# EAGLE board r0.4.0 (EAGLE 7.2.0)
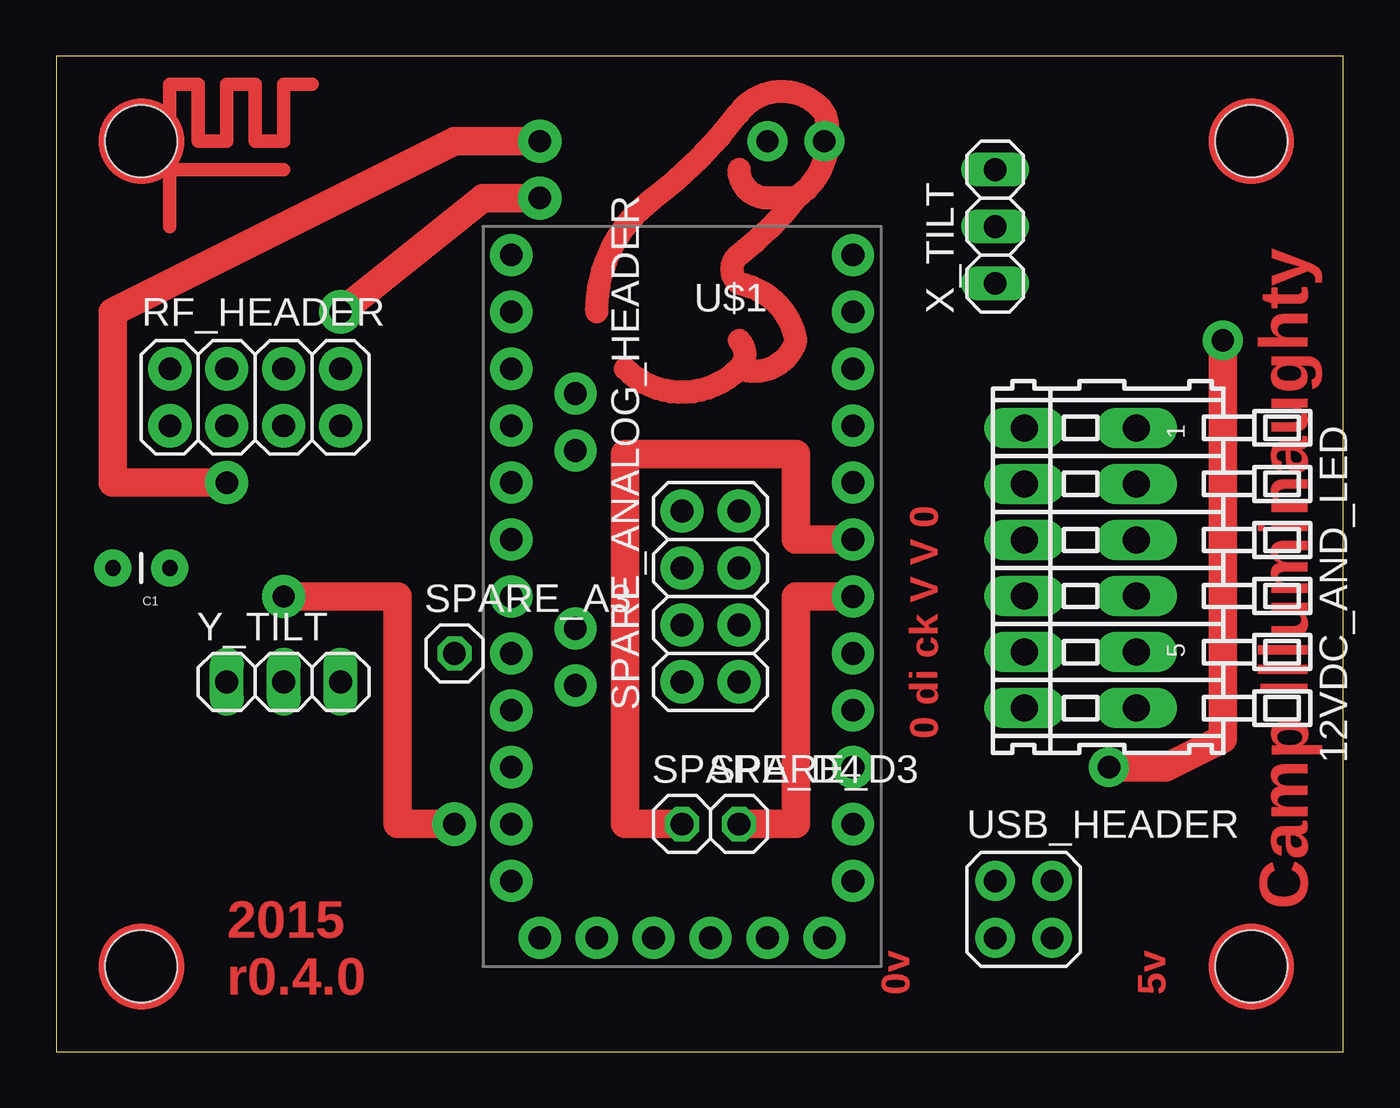
[diagram p0: board, top side]
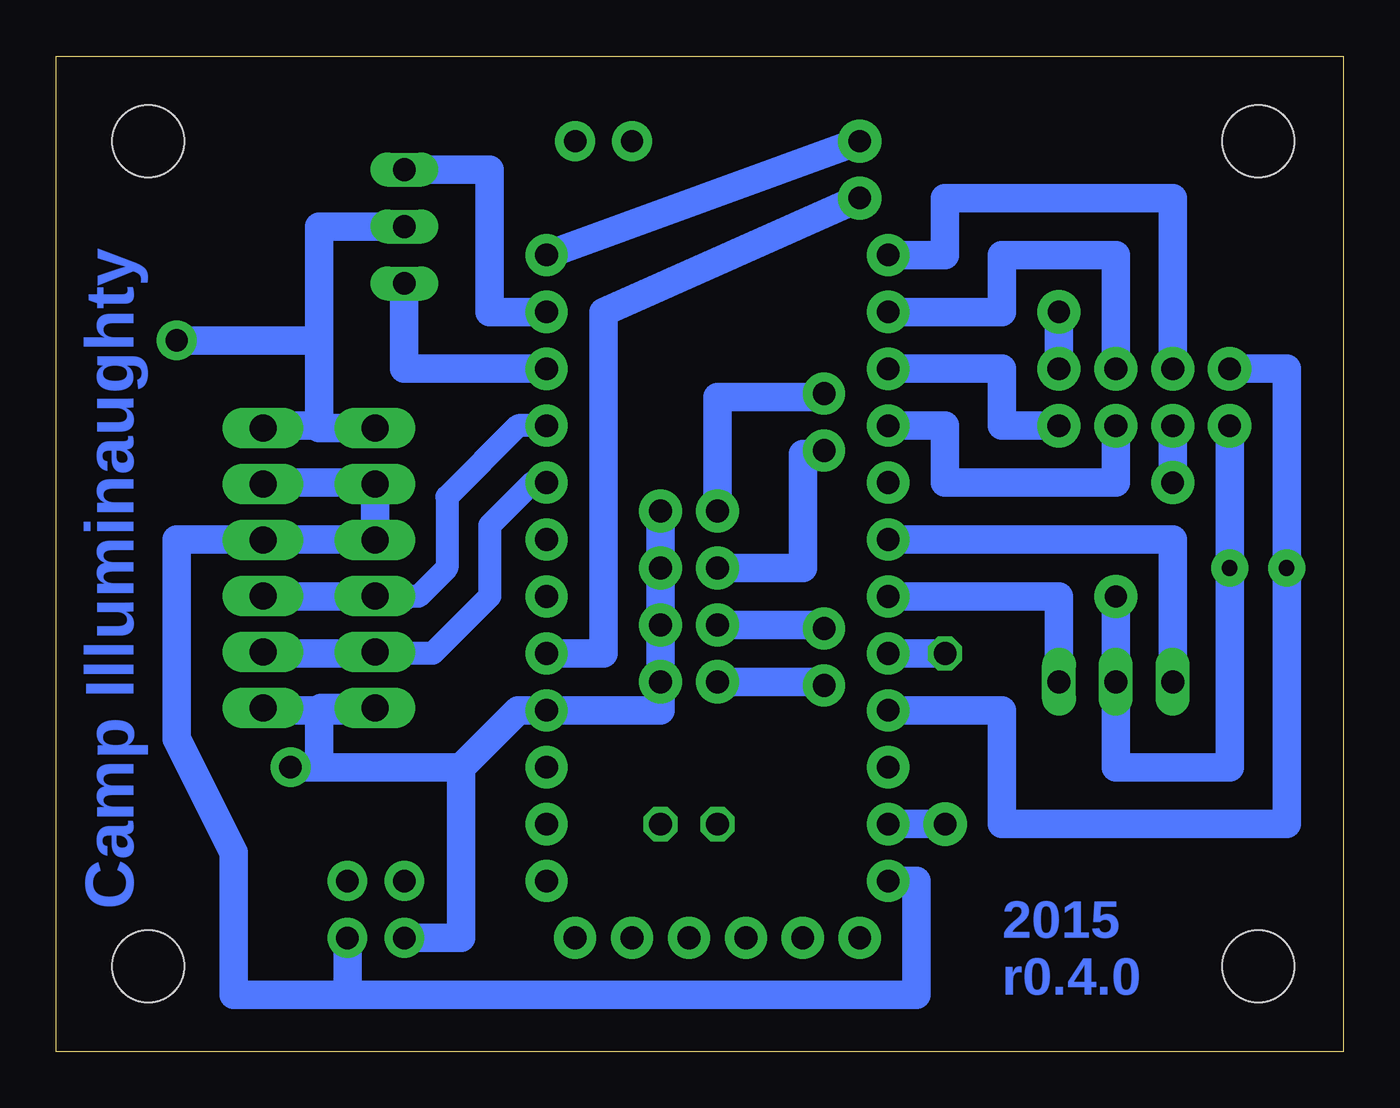
[diagram p1: board, bottom side, seen from below]

Size 57.45 x 44.44 mm. Coordinates in mm from the lower left corner, seen from the top.
Outline: 0,0 57.45,0 57.45,44.44 0,44.44 0,0
Copper layers (1*16): Top 0.035mm / dielectric 1.5mm / Bottom 0.035mm
Design rules "default": minimum track width 10mil, minimum drill 24mil, track to track 8mil, track to pad 8mil, pad to pad 8mil, via to via 8mil, smd to smd 8mil, copper to edge 40mil, drill to drill 8mil, minimum pad ring 10mil, minimum via ring 8mil, stop-mask expansion 4mil, vias tented up to drill 0mil, thermal gap 10mil
Holes 3.2 mm at 3.81,40.64 3.81,3.81 53.34,40.64 53.34,3.81

## Footprints (pad centres in the part's own frame; a part is rotated, then mirrored left to right if it is on the bottom)
234-206 = drill 1.2 long: A1 -6.25,2.5; A2 -3.75,2.5; A3 -1.25,2.5; A4 1.25,2.5; A5 3.75,2.5; A6 6.25,2.5; B1 -6.25,-2.5; B2 -3.75,-2.5; B3 -1.25,-2.5; B4 1.25,-2.5; B5 3.75,-2.5; B6 6.25,-2.5
CAP-PTH-SMALL = drill 0.7 pad 1.651: 1 0,0; 2 2.54,0
2X04 = drill 1.016 pad 1.93: 1 -3.81,-1.27; 2 -3.81,1.27; 3 -1.27,-1.27; 4 -1.27,1.27; 5 1.27,-1.27; 6 1.27,1.27; 7 3.81,-1.27; 8 3.81,1.27
1X01 = drill 1.016 octagon: 1 0,0
ARDUINO_PRO_MINI = drill 1.016 pad 1.88: 1 -7.62,12.7; 2 -7.62,10.16; 3 -7.62,7.62; 4 -7.62,5.08; 5 -7.62,2.54; 6 -7.62,0; 7 -7.62,-2.54; 8 -7.62,-5.08; 9 -7.62,-7.62; 10 -7.62,-10.16; 11 -7.62,-12.7; 12 -7.62,-15.24; 13 7.62,-15.24; 14 7.62,-12.7; 15 7.62,-10.16; 16 7.62,-7.62; 17 7.62,-5.08; 18 7.62,-2.54; 19 7.62,0; 20 7.62,2.54; 21 7.62,5.08; 22 7.62,7.62; 23 7.62,10.16; 24 7.62,12.7; A4 4.763,1.429; A5 4.763,3.969; A6 4.763,-9.049; A7 4.763,-6.509; BLK -6.35,15.24; GND -3.81,15.24; GRN 6.35,15.24; RXI 1.27,15.24; TXO 3.81,15.24; VCC -1.27,15.24
2X02 = drill 1 pad 1.778: 1 -1.27,-1.27; 2 -1.27,1.27; 3 1.27,-1.27; 4 1.27,1.27
1X03 = drill 1.016 long: 1 -2.54,0; 2 0,0; 3 2.54,0

## Placement (x,y rotation side)
12VDC_AND_LED  value?  [234-206]  45.72,21.59 270 top
C1  10u  [CAP-PTH-SMALL]  5.08,21.59 180 top
RF_HEADER  value?  [2X04]  8.89,29.21 0 top
SPARE_A3  [1X01]  17.78,17.78 0 top
SPARE_ANALOG_HEADER  value?  [2X04]  29.21,20.32 90 top
SPARE_D3  [1X01]  30.48,10.16 0 top
SPARE_D4  [1X01]  27.94,10.16 0 top
U$1  ARDUINO_PRO_MINI  [ARDUINO_PRO_MINI]  27.94,20.32 180 top
USB_HEADER  [2X02]  43.18,6.35 0 top
X_TILT  value?  [1X03]  41.91,36.83 90 top
Y_TILT  value?  [1X03]  10.16,16.51 0 top

## Library data of the parts
12VDC_AND_LED = con-wago; MPN: 234-206; OC_FARNELL: unknown; OC_NEWARK: 28K9095
C1 = SparkFun-Passives
RF_HEADER SPARE_ANALOG_HEADER = rf-header
SPARE_A3 SPARE_D3 SPARE_D4 X_TILT Y_TILT = pinhead
U$1 = SparkFun-Boards
USB_HEADER = usb-header

## Nets
N$1: U$1.10 X_TILT.1
N$4: 12VDC_AND_LED.B1 12VDC_AND_LED.B6 SPARE_ANALOG_HEADER.1 SPARE_ANALOG_HEADER.3 SPARE_ANALOG_HEADER.5 SPARE_ANALOG_HEADER.7 U$1.4 USB_HEADER.1 X_TILT.2
N$6: U$1.11 X_TILT.3
N$7: 12VDC_AND_LED.B5 U$1.8
N$9: 12VDC_AND_LED.B2 12VDC_AND_LED.B3 U$1.24 USB_HEADER.3
N$10: C1.1 RF_HEADER.1 U$1.23 Y_TILT.2
N$11: 12VDC_AND_LED.B4 U$1.9
N$12: SPARE_ANALOG_HEADER.4 U$1.A4
N$14: U$1.19 Y_TILT.3
N$15: RF_HEADER.3 U$1.12
N$16: RF_HEADER.4 U$1.13
N$17: RF_HEADER.6 U$1.14
N$18: SPARE_ANALOG_HEADER.2 U$1.A5
N$19: SPARE_ANALOG_HEADER.8 U$1.A6
N$20: SPARE_ANALOG_HEADER.6 U$1.A7
N$21: RF_HEADER.7 U$1.15
N$23: RF_HEADER.5 U$1.16
N$25: RF_HEADER.8 U$1.5
N$27: U$1.18 Y_TILT.1
N$28: SPARE_A3.1 U$1.20
N$29: SPARE_D3.1 U$1.6
N$30: SPARE_D4.1 U$1.7
Y_TILT: C1.2 RF_HEADER.2 U$1.21

## Tracks (layer width: path | path; a pad name or v marks a point on that pad's centre or on a via)
N$1
  Bottom 1.27: U$1.10 41.91,30.48 X_TILT.1
N$2
  Top 1.016: 24.13,33.02 arc-53 26.67,38.1 arc16 30.48,41.91 arc-106 34.29,41.91 arc-74 33.02,38.1 | 33.02,38.1 arc-16 30.48,35.56 arc106 30.48,34.29 arc-69 33.02,31.75 arc-94 30.48,30.48 | 33.02,38.1 31.75,38.1 arc-90 30.48,39.37
N$3
  Top 1.016: 30.48,31.75 arc-90 30.48,30.48 arc-90 25.4,30.48
N$4  (via drill 1 pad 1.78)
  Top 1.27: v52.07,31.75 52.07,13.97 49.53,12.7 v46.99,12.7
  Bottom 1.27: 43.18,15.34 12VDC_AND_LED.B6 45.62,15.34 45.72,15.24 45.72,12.7 | SPARE_ANALOG_HEADER.1 30.48,15.24 U$1.4 36.83,15.24 39.37,12.7 | SPARE_ANALOG_HEADER.1 SPARE_ANALOG_HEADER.3 SPARE_ANALOG_HEADER.5 SPARE_ANALOG_HEADER.7 SPARE_ANALOG_HEADER.1 | 43.22,27.94 12VDC_AND_LED.B1 45.72,27.84 45.72,27.94 | X_TILT.2 45.72,36.83 45.72,31.75 | 39.37,12.7 39.37,5.08 USB_HEADER.1 | 39.37,12.7 45.72,12.7 | 45.72,12.7 v46.99,12.7 | 45.72,27.94 45.72,31.75 | 45.72,31.75 v52.07,31.75 | 45.72,27.94 48.26,27.94
N$5
  Bottom 1.27: 43.18,25.4 48.26,25.4
N$6
  Bottom 1.27: X_TILT.3 38.1,39.37 38.1,33.02 U$1.11
N$7
  Bottom 1.016: U$1.8 36.2,25.4 38.1,23.5 38.1,20.32 40.64,17.78 43.16,17.78 12VDC_AND_LED.B5
N$8
  Top 0.61: 5.08,39.37 5.08,43.18 6.35,43.18 6.35,40.64 7.62,40.64 7.62,43.18 8.89,43.18 8.89,40.64 10.16,40.64 10.16,43.18 11.43,43.18 | 5.08,36.83 5.08,39.37 | 5.08,39.37 10.16,39.37
N$9
  Bottom 1.27: U$1.24 19.05,7.62 19.05,2.54 44.45,2.54 | 12VDC_AND_LED.B2 43.22,22.86 | 43.22,22.86 12VDC_AND_LED.B3 | 44.45,2.54 49.53,2.54 49.53,8.89 52.07,13.97 52.07,22.86 43.22,22.86 | USB_HEADER.3 44.45,2.54
N$10  (via drill 1 pad 1.93)
  Top 1.27: v17.78,10.16 15.24,10.16 15.24,20.32 v10.16,20.32
  Bottom 1.27: RF_HEADER.1 C1.1 5.08,12.7 10.16,12.7 Y_TILT.2 v10.16,20.32 | v17.78,10.16 U$1.23
N$11
  Bottom 1.016: 12VDC_AND_LED.B4 43.2,20.32 43.18,20.32 41.27,20.32 40.01,21.59 40.01,24.77 36.83,27.94 U$1.9
  Bottom 1.27: 41.93,20.32 12VDC_AND_LED.B4 | 43.18,20.32 48.26,20.32
N$12
  Bottom 1.27: SPARE_ANALOG_HEADER.4 23.34,19.05 U$1.A4
N$13
  Bottom 1.27: 43.18,17.78 48.26,17.78
N$14
  Bottom 1.27: U$1.19 12.7,20.32 Y_TILT.3
N$15  (via drill 1 pad 1.93)
  Top 1.27: v7.62,25.4 2.54,25.4 2.54,33.02 17.78,40.64 v21.59,40.64
  Bottom 1.27: RF_HEADER.3 v7.62,25.4 | v21.59,40.64 U$1.12
N$16
  Bottom 1.27: U$1.13 17.78,35.56 17.78,38.1 7.62,38.1 RF_HEADER.4
N$17
  Bottom 1.27: U$1.14 15.24,33.02 15.24,35.56 10.16,35.56 RF_HEADER.6
N$18
  Bottom 1.27: SPARE_ANALOG_HEADER.2 23.34,16.51 U$1.A5
N$19
  Bottom 1.27: SPARE_ANALOG_HEADER.8 27.94,29.21 23.34,29.21 U$1.A6
N$20
  Bottom 1.27: SPARE_ANALOG_HEADER.6 24.13,21.59 24.13,26.67 23.34,26.67 U$1.A7
N$21
  Bottom 1.27: U$1.15 15.24,30.48 15.24,27.94 RF_HEADER.7
N$22
  Bottom 1.27: 43.18,15.24 48.26,15.24
N$23
  Bottom 1.27: U$1.16 17.78,27.94 17.78,25.4 10.16,25.4 RF_HEADER.5
N$24  (via drill 1 pad 1.78)
  other vias: 31.75,40.64
N$25  (via drill 1 pad 1.93)
  Top 1.27: v12.7,33.02 19.05,38.1 v21.59,38.1
  Bottom 1.27: RF_HEADER.8 v12.7,33.02 | U$1.5 33.02,17.78 33.02,33.02 v21.59,38.1
N$26  (via drill 1 pad 1.78)
  other vias: 34.29,40.64
N$27
  Bottom 1.27: Y_TILT.1 7.62,22.86 U$1.18
N$28
  Bottom 1.27: U$1.20 SPARE_A3.1
N$29
  Top 1.27: SPARE_D3.1 33.02,10.16 33.02,20.32 U$1.6
N$30
  Top 1.27: U$1.7 33.02,22.86 33.02,26.67 25.4,26.67 25.4,10.16 SPARE_D4.1
Y_TILT
  Bottom 1.27: U$1.21 15.24,15.24 15.24,10.16 2.54,10.16 C1.2 2.54,30.48 RF_HEADER.2
(copper drawn outside any net)
  shapes: Top circle x4

## Text on the board
Top: 0 di ck V V 0 | Camp Illuminaughty | 2015 | r0.4.0 | 0v | 5v
Bottom: Camp Illuminaughty | 2015 | r0.4.0